# Altium PCB Monotith_MainPart_A_V5.0.PcbDoc
Units mil, origin at the board's own origin, x right, y up, seen from the top; angles counter-clockwise.
Board outline 4035.32 x 1310.05 mil, 2 copper layers (Top Layer, Bottom Layer); 115 components, 68 nets, 355 pads, 314 vias.
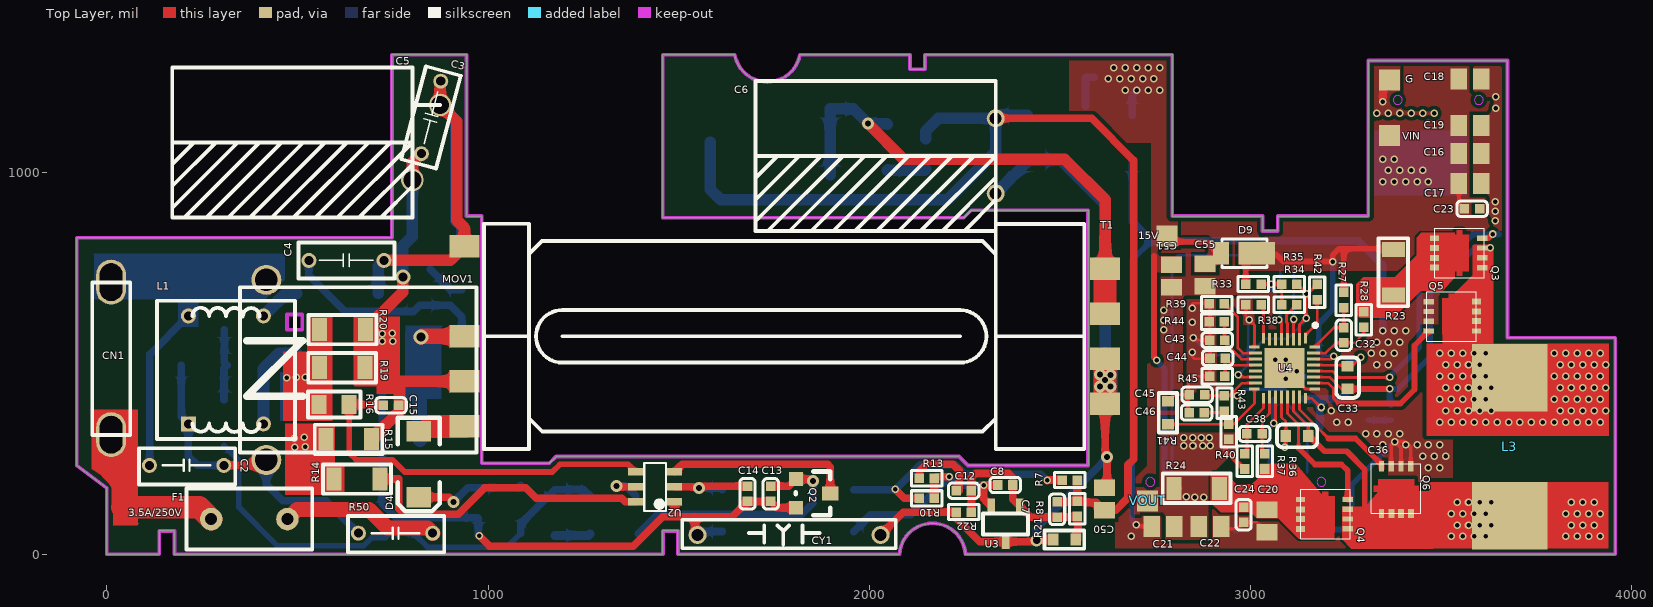
[diagram p0: Top Layer view]
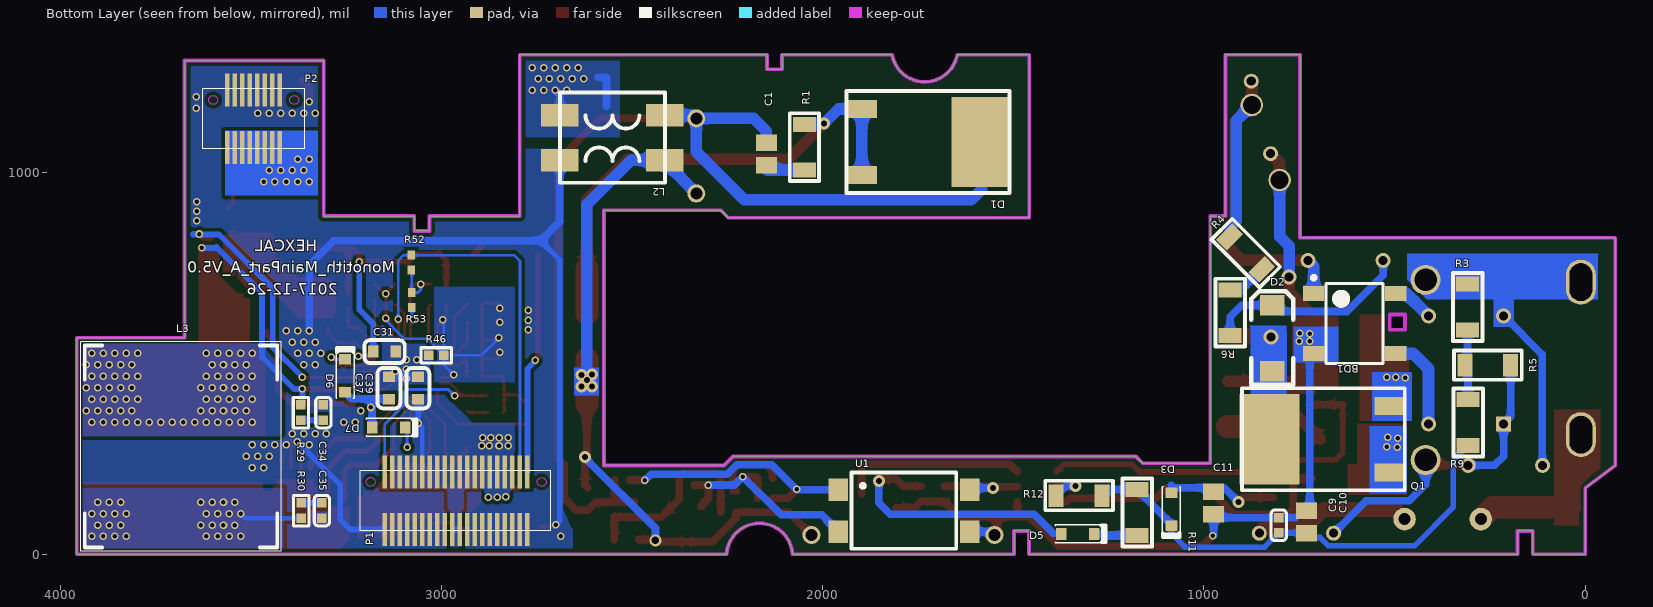
[diagram p1: Bottom Layer view, seen from below]

## Layer stack, top to bottom
Top Solder: solder mask 0.4, Solder Resist, Dk 3.5
Top Layer: signal copper 1.4
Dielectric 1: dielectric 12.6, FR-4, Dk 4.8
Bottom Layer: signal copper 1.4
Bottom Solder: solder mask 0.4, Solder Resist, Dk 3.5

## Board outline
0,0 137.99,0 137.99,60.92 177.36,60.92 177.36,0 1458.85,0 1458.85,60.92 1498.22,60.92 1498.22,0 2079.22,0 cw(c2165.66,-5.55) 2252.09,0.08 2252.09,0 3956.57,0 3956.57,567.46 3673.57,567.46 3673.53,567.51 3673.53,1294.74 3308.56,1294.74 3308.56,886.92 3071.06,886.92 3071.06,847.78 3031.69,847.78 3031.69,886.92 2794.39,886.92 2794.39,1310.05 2145.86,1310.05 2145.86,1271.99 2106.49,1271.99 2106.49,1310.05 1817.88,1310.05 1817.88,1310.04 cw(c1732.6,1325.18) 1647.32,1310.03 1647.32,1310.05 1458.16,1310.05 1458.16,882.54 2247.62,882.54 2267.25,902.17 2573.86,902.17 2573.86,232.88 2258.9,232.88 2258.9,232.93 2235.27,256.56 1178.77,256.56 1178.76,256.56 1160.66,238.45 983.81,238.45 983.81,886.92 943.99,886.92 943.99,1310.05 748.04,1310.05 748.03,829.74 -78.74,829.74 -78.74,232.86 0,173.8
cut-out: 472.57,588.46 512.57,588.46 512.57,628.46 472.57,628.46

## Design rules (kind name [scope] priority, off if disabled: settings)
Clearance Clearance_2 [OnLayer('Top Overlay') vs OnLayer('Keep-Out Layer')] p1: gap=0
Clearance Clearance_1 [OnLayer('Keep-Out Layer') vs InComponent('T1')] p2: gap=0
Clearance [All] p3: gap=6 except(10: Arc-Poly Track-Poly SMDPad-Poly THPad-Poly Via-Poly Fill-Poly Poly-Poly)
ComponentClearance [All] p1 off: gap=10 collisioncheckmode=3 verticalgap=10 showdistances=FALSE
DiffPairsRouting [All] p1: maxlimit=10 minlimit=7 mostfreqgap=7 toplayer_minwidth=7 toplayer_maxwidth=15 toplayer_prefwidth=7 bottomlayer_minwidth=7 bottomlayer_maxwidth=15 bottomlayer_prefwidth=7 maxuncoupledlength=500
HoleToHoleClearance [All] p1 off: gap=10 allowstackedmicrovias=TRUE
MinimumSolderMaskSliver [All] p1 off: minsoldermaskwidth=10
PolygonConnect [All] p1: connectstyle=Direct reliefconductorwidth=10 reliefentries=4 polygonreliefangle="90 Angle" airgapwidth=10
RoutingVias [All] p1: holewidth=15.75 width=31.5 viastyle="Through Hole" minholewidth=11.81 minwidth=7.87 maxholewidth=28 maxwidth=50
SilkToSilkClearance [All] p1 off: silktosilkclearance=10
SilkToSolderMaskClearance [IsPad] p1 off: minsilkscreentomaskgap=10 clearancetoexposedcopper=TRUE
SolderMaskExpansion [All] p1: expansion=4
Width [All] p1: maxlimit=60 minlimit=7 preferedwidth=10
24 further rules are at their usual default settings.

## Classes and differential pairs
component class Monotith-MainPart-SC8701-V5.0: C16 C17 C18 C19 C20 C21 C22 C23 C24 C31 C32 C33 C34 C35 C36 C37 C38 C39 C43 C44 C45 C46 D6 D7 G L3 P1 P2 Q3 Q4 Q5 Q6 R23 R24 R27 R28 R29 R30 R33 R34 R35 R36 R37 R38 R39 R40 R41 R42 R43 R44 R45 R46 R52 R53 U4 VIN VOUT
component class Monotith-MainPart-ACDC-V5.0: 15V BD1 C1 C2 C3 C4 C5 C6 C7 C8 C9 C10 C11 C12 C13 C14 C15 C50 C51 C55 CN1 CY1 D1 D2 D3 D4 D5 D9 F1 L1 L2 MOV1 Q1 Q2 R1 R3 R4 R5 R6 R7 R8 R9 R10 R11 R12 R13 R14 R15 R16 R19 R20 R21 R22 R50 T1 U1 U2 U3
differential pair SW2: +SW2_P -SW2_N
differential pair SW1: +SW1_P -SW1_N
differential pair SNS2: +SNS2_P -SNS2_N
differential pair SNS1: +SNS1_P -SNS1_N

## Components (designator, comment, footprint, x,y, rotation, side; value= is the part's Value field where it differs from the comment)
15V "Testpoint" TP_Pad 2781,835 r0 top
BD1 "ABS210" SOP400P640X170-4N 605,605 r180 bottom
C1 "1nF" C0805 2147.57,1049.46 r90 bottom
C2 "0.33uF" CAP50 337,278 r180 top
C3 "10nF" CAP-5 850.57,1145.46 r255 top
C4 "2.2nF" CAP-5 628.57,770.46 r180 top
C5 "22uF" EC-1016-3 860.63,1079.89 r0 top locked
C6 "680uF/25V" EC-1016 2331.57,1241.46 r180 top locked
C7 "NC" C0402 2492.57,117.46 r0 top
C8 "47pF" C0402 2356.57,181.46 r90 top
C9 "0.1uF" C0402 804,76 r0 bottom
C10 "4.7uF" C0805 731,84 r90 bottom
C11 "22uF" C0805 974.57,134.46 r270 bottom
C12 "0.1uF" C0402 2247.57,166.46 r90 top
C13 "100pF" C0402 1741.57,158.46 r180 top
C14 "1nF" C0402 1680.57,158.46 r0 top
C15 "200pF" C0402 745.57,390.46 r90 top
C16 "22uF" C0805 3576.1,1050.46 r180 top
C17 "22uF" C0805 3576.1,972.46 r180 top
C18 "22uF" C0805 3576.1,1246.46 r180 top
C19 "22uF" C0805 3576.05,1124.46 r180 top
C20 "22uF" C0805 3042.57,87.46 r90 top
C21 "22uF" C0805 2770,73 r0 top
C22 "22uF" C0805 2894,73 r180 top
C23 "0.1uF" C0402 3581,906 r270 top
C24 "0.1uF" C0402 2981.57,103.46 r180 top
C31 "1uF" C0603 3149.05,531.46 r270 bottom
C32 "47pF" C0402 3244.57,574.46 r0 top
C33 "0.1uF" C0603 3254.57,462.99 r180 top
C34 "1nF" C0402 3309.57,371.46 r0 bottom
C35 "1nF" C0402 3313.57,114.46 r180 bottom
C36 "0.1uF" C0603 3122.1,310.46 r270 top
C37 "1uF" C0603 3137.57,435.46 r0 bottom
C38 "47pF" C0402 3010.57,315.46 r270 top
C39 "1uF" C0603 3061.57,435.46 r180 bottom
C43 "2.2nF" C0402 2912.57,561.46 r270 top
C44 "2.2nF" C0402 2913.57,514.46 r270 top
C45 "NC" C0402 2859.57,418.46 r270 top
C46 "22nF" C0402 2858.57,371.46 r270 top
C50 "10nF/50V" C0805 2616.57,144.46 r270 top
C51 "0.01uF" C0805 2792,730 r90 top
C55 "22uF/25V" C0805 2881,732 r90 top
CN1 "CON2" 220V_IN 11.57,513.46 r90 top
CY1 "1nF" CY1 1534.57,10.46 r0 top
D1 "STPS15H100CB-TR" TO-252-DIODE 1937.51,1081.18 r270 bottom
D2 "RS1M" SMD-MLL34 820.57,566.46 r90 bottom
D3 "1N4148" SOD-323F 1085.57,117.46 r270 bottom
D4 "SIM13-F" SMD-MLL34 818,236 r270 top
D5 "22V" SOD-323F 1330.57,53.46 r180 bottom
D6 "BAT46WJ" SOD-323F 3252.57,467.46 r90 bottom
D7 "BAT46WJ" SOD-323F 3138.57,332.46 r180 bottom
D9 "NC" POWERDI123 2902,789 r0 top
F1 "3.5A/250V" 392 209,12 r0 top
G "Testpoint" TP_Pad 3364.57,1243.46 r90 top
L1 "20mH" T7.5*7*8 312.57,483.46 r0 top
L2 "300uH" L-7*6 2551.57,1092.46 r0 bottom
L3 "2.2uH" S0565 3945.57,557.46 r270 bottom locked
MOV1 "10D471" 10D471 418.57,483.46 r270 top
P1 "BtoB_connector_2*20_3H" BB0508-40FTAGF3.0 3148.43,65 r180 bottom
P2 "Header 8X2A" BtoB_connector_2*8_3H 3492.47,1142.07 r180 bottom
Q1 "SW7N65D" TO-252-MOS 473.58,301.46 r90 bottom
Q2 "MMBT3904" "SOT-23 - Transistor" 1852.57,159.46 r270 top
Q3 "AON7752" DFN3.3*3.3_8L 3548,790 r180 top
Q4 "AON7752" DFN3.3*3.3_8L 3196,105 r180 top
Q5 "VS3618AE" DFN3.3*3.3_8L 3527,624 r0 top
Q6 "VS3618AE" DFN3.3*3.3_8L 3382,172 r270 top
R1 "20R" R1206 2047.57,1067.46 r90 bottom
R3 "1.5M" R1206 308.57,648.46 r270 bottom
R4 "100K" R1206 890.57,789.46 r225 bottom
R5 "1.5M" R1206 255.57,495.46 r180 bottom
R6 "100K" R1206 931.57,633.46 r270 bottom
R7 "750R" R0402 2525.57,194.46 r270 top
R8 "137K" R0402 2545.57,119.46 r0 top
R9 "100K" R1206 307.57,345.46 r270 bottom
R10 "1K" R0402 2150.57,146.46 r90 top
R11 "1K" R1206 1175.57,109.46 r270 bottom
R12 "10R" R1206 1327.57,153.46 r180 bottom
R13 "4.7K" R0402 2150.57,199.46 r270 top
R14 "10R" R1206 656.57,197.46 r180 top
R15 "10K" R1206 634.57,301.46 r180 top
R16 "430R" R0805 596.57,392.46 r0 top
R19 "1.3R" R1206 617.57,489.46 r180 top
R20 "1.2R" R1206 618.57,589.46 r180 top
R21 "3.3M" R0603 2511.57,38.46 r0 top
R22 "27K" R0402 2247.57,110.46 r90 top
R23 "0.01R" R1206 3374.57,739.46 r90 top
R24 "0.01R" R1206 2858.57,172.46 r0 top
R27 "1K" R0402 3244.57,666.46 r180 top
R28 "1K" R0402 3296.57,615.46 r180 top
R29 "2.2R" R0402 3368.57,371.46 r180 bottom
R30 "2.2R" R0402 3367.57,114.46 r0 bottom
R33 "100K" R0402 3007.57,708.46 r270 top
R34 "100K" R0402 3101.57,654.46 r90 top
R35 "100K" R0402 3101.57,708.46 r270 top
R36 "1K" R0402 3037.57,243.46 r0 top
R37 "1K" R0402 2984.57,243.46 r0 top
R38 "0R" R0402 3007.57,654.46 r90 top
R39 "68K" R0402 2911.57,656.46 r90 top
R40 "100K" R0402 2943,321 r0 top
R41 "30K" R0603 2783,371 r270 top
R42 "51K" R0402 3174.57,687.46 r180 top
R43 "4.99K" R0402 2931.57,395.46 r180 top
R44 "12.1K" R0402 2911.57,609.46 r90 top
R45 "12.1K" R0402 2912.57,466.46 r90 top
R46 "0R" R0402 3013.57,521.46 r270 bottom
R50 "NTC" CAP50 885,100 r180 top
R52 "0R" 0402 3078.57,764.46 r270 bottom
R53 "0R" 0402 3077.57,666.46 r90 bottom
T1 "T-EDR2810" EDR2810 1776.57,571.46 r0 top
U1 "FOD817CSD" FOD817CSD 1924.57,14.46 r180 bottom
U2 "OB2273" SOT-23-6 1438.57,176.46 r270 top
U3 "TL431" SOT-23-TL431 2357.57,79.46 r180 top
U4 "SC8701" QFN40P400X400X75_HS-33N 3088.96,488.09 r270 top
VIN "Testpoint" TP_Pad 3364.57,1098.46 r90 top
VOUT "Testpoint" TP_Pad 2730,140 r90 top

## Footprints (in the part's own frame and the unit in brackets; to place one, negate y for a bottom-side part, rotate by r counter-clockwise, add the part's x,y. Pads: shape width x height; smd on the part's side, far side on the other; paste and mask are expansions set on the pad)
10D471 [mm]
  round 2 hole 1.5: 1(-6,0) 2(6,0)
  silkscreen extent -5.5,-1.75 5.5,14
220V_IN [mm]
  oval 3x2 hole 1.5 slot 2.5 at 0 deg: 1(-5.081,0) 2(5.081,0)
  silkscreen extent -5.1,-1.28 5.06,1.26
392 [mm]
  round 1.5 hole 0.8: 1(1.651,2.032) 2(6.731,2.032)
  silkscreen extent 0,0 8.38,4.06, body extent 0,0 8.38,4.06, height 7.2
0402 [mm] "Chip Capacitor, Body 1.0x0.5mm, IPC High Density"
  rect 0.6x0.5 smd: 1(-0.5,0) 2(0.5,0)
  body extent -0.55,-0.3 0.55,0.3, height 1.3
BB0508-40FTAGF3.0 [mm]
  rect 0.3x2.2 smd: 1(0,0) 2(0.5,0) 3(1,0) 4(1.5,0) 5(2,0) 6(2.5,0) 7(3,0) 8(3.5,0) 9(4,0) 10(4.5,0) 11(5,0) 12(5.5,0) 13(6,0) 14(6.5,0) 15(7,0) 16(7.5,0) 17(8,0) 18(8.5,0) 19(9,0) 20(9.5,0) 21(9.5,3.83) 22(9,3.83) 23(8.5,3.83) 24(8,3.83) 25(7.5,3.83) 26(7,3.83) 27(6.5,3.83) 28(6,3.83) 29(5.5,3.83) 30(5,3.83) 31(4.5,3.83) 32(4,3.83) 33(3.5,3.83) 34(3,3.83) 35(2.5,3.83) 36(2,3.83) 37(1.5,3.83) 38(1,3.83) 39(0.5,3.83) 40(0,3.83)
  Keep-Out Layer circle w0.013: c10.45,3.165 r0.3
  Keep-Out Layer circle w0.013: c-0.95,3.165 r0.3
  silkscreen extent -1.65,-0.09 11.05,3.91
BtoB_connector_2*8_3H [mm]
  rect 0.3x2.2 smd: 1(-1.75,-1.915) 2(-1.25,-1.915) 3(-0.75,-1.915) 4(-0.25,-1.915) 5(0.25,-1.915) 6(0.75,-1.915) 7(1.25,-1.915) 8(1.75,-1.915) 9(1.75,1.915) 10(1.25,1.915) 11(0.75,1.915) 12(0.25,1.915) 13(-0.25,1.915) 14(-0.75,1.915) 15(-1.25,1.915) 16(-1.75,1.915)
  Keep-Out Layer circle w0.013: c-2.7,1.25 r0.3
  Keep-Out Layer circle w0.013: c2.7,1.25 r0.3
  silkscreen extent -3.4,-2 3.4,2
C0402 [mil]
  rect 25x25 smd: 1(0,20) 2(0,-20)
  silkscreen extent -20,-40 20,40
C0603 [mm]
  rect 0.8x0.7 smd: 1(0,-0.75) 2(0,0.75)
  silkscreen extent -0.76,-1.35 0.76,1.35
C0805 [mm] "Chip Capacitor, Body 2.0x1.3mm, IPC High Density"
  rect 1.1x1.4 smd: 1(-0.75,0) 2(0.75,0)
  body extent -1.1,-0.72 1.1,0.72, height 1.4
CAP50 [mm]
  round 1 hole 0.6: 1(0.762,1.143) 2(5.715,1.143)
  silkscreen extent 0,0 6.4,2.41
CAP-5 [mm]
  round 1 hole 0.6: 1(-2.5,0) 2(2.5,0)
  silkscreen extent -3.2,-1.2 3.2,1.2
CY1 [mm]
  round 1.2 hole 0.8: 1(0.381,1.016) 2(12.573,1.016)
  silkscreen extent -0.64,0.13 13.59,2.03
DFN3.3*3.3_8L [mm]
  rect 0.7x0.35 smd: 1(-1.5,0.975) 2(-1.5,0.325) 3(-1.5,-0.325) 4(-1.5,-0.975)
  rect 0.6x0.35 smd: 5(1.65,-0.975)
  rect 0.6x0.4 smd: 6(1.65,-0.325) 7(1.65,0.325) 8(1.65,0.975)
  Top Layer region: -0.63,-1.225 1.426,-1.225 1.426,1.225 -0.63,1.225
  Top Layer region: -0.215,-1.525 0.215,-1.525 0.215,-0.925 -0.215,-0.925
  Top Layer region: -0.215,0.925 0.215,0.925 0.215,1.525 -0.215,1.525
  silkscreen extent -1.65,-1.65 1.65,1.65, body extent -1.65,-1.65 1.65,1.65, height 0.8
EC-1016 [mm]
  round 1.2 hole 0.8: 1(0,2.5) 2(0,7.5)
  silkscreen extent 0,0 16,10
EC-1016-3 [mm]
  round 1.5 hole 1.2: 1(0.356,2.5) 2(-1.5,-2.5)
  silkscreen extent -17.5,-5 0.36,5
EDR2810 [mm]
  rect 2x1.5 smd: 1(-21.3,6) 3(-21.3,0) 4(-21.3,-3) 5(-21.3,-6) 6(21.387,-4.5) 7(21.387,-1.5) 8(21.387,1.5) 9(21.387,4.5)
  silkscreen extent -20,-7.5 20,7.5
FOD817CSD [mil]
  rect 51.18x59.06 smd: 1(-35,155) 2(-35,45) 3(310,45) 4(310,155)
  silkscreen extent 0,0 275,200, body extent 0,0 275,200, height 157
L-7*6 [mm]
  rect 2.5x1.5 smd: 1(-3.5,1.5) 2(-3.5,-1.5) 3(3.5,-1.5) 4(3.5,1.5)
  silkscreen extent -3.5,-3 3.5,3
POWERDI123 [mm]
  rect 1.05x1.5 smd: A(0.525,0.011)
  rect 2.4x1.5 smd: K(2.9,0.012)
  silkscreen extent 0.6,-0.94 3.6,0.96, body extent 0.6,-0.95 3.6,0.98, height 1
QFN40P400X400X75_HS-33N [mm] "QFN, 32-Leads, Body 4.00x4.00mm, Pitch 0.40mm, Thermal Pad 2.65x2.65mm, IPC Medium Density"
  rect 0.7x0.2 smd: 1(-2,1.4) 8(-2,-1.4) 17(2,-1.4) 24(2,1.4)
  rect 0.85x0.2 smd: 2(-1.925,1) 3(-1.925,0.6) 4(-1.925,0.2) 5(-1.925,-0.2) 6(-1.925,-0.6) 7(-1.925,-1) 18(1.925,-1) 19(1.925,-0.6) 20(1.925,-0.2) 21(1.925,0.2) 22(1.925,0.6) 23(1.925,1)
  rect 0.2x0.7 smd: 9(-1.4,-2) 16(1.4,-2) 25(1.4,2) 32(-1.4,2)
  rect 0.2x0.85 smd: 10(-1,-1.925) 11(-0.6,-1.925) 12(-0.2,-1.925) 13(0.2,-1.925) 14(0.6,-1.925) 15(1,-1.925) 26(1,1.925) 27(0.6,1.925) 28(0.2,1.925) 29(-0.2,1.925) 30(-0.6,1.925) 31(-1,1.925)
  rect 2.65x2.65 smd: 33(0,0)
  silkscreen extent -2.97,1.93 -2.73,2.18, body extent -2.07,-2.07 2.07,2.07, height 0.75
R0402 [mil]
  rect 25x25 smd: 1(0,20) 2(0,-20)
  silkscreen extent -20,-40 20,40
R0603 [mm]
  rect 0.7x0.8 smd: 1(-0.75,0) 2(0.75,0)
  silkscreen extent -1.32,-0.61 1.32,0.61
R0805 [mm]
  rect 1x1.27 smd: 1(-1,0) 2(1,0)
  silkscreen extent -1.74,-0.86 1.74,0.86
R1206 [mil]
  rect 39.37x60 smd: 1(-60,0) 2(60,0)
  silkscreen extent -89,-38 89,39
S0565 [mm]
  rect 4.5x5 smd far side: 1(2.4,6.75) 2(11.6,6.75)
  silkscreen extent 0,0 13.97,13.33, body extent 0,0 13.97,13.33, height 6.5
SMD-MLL34 [mil]
  rect 54x64 smd: A(-86.61,0) K(86.61,0)
  silkscreen extent -122,-55 123,55
SOD-323F [mm]
  rect 0.7x0.8 smd: A(-1.1,0) K(1.1,0)
  silkscreen extent -1.5,-0.63 1.93,0.6
SOP400P640X170-4N [mm] "SOP, 4-Leads, Body 5.05x4.40mm, Pitch 4.00mm, IPC Medium Density"
  rect 1.45x1 smd: 1(-2.725,2) 2(-2.725,-2) 3(2.725,-2) 4(2.725,2)
  silkscreen extent -2.85,-2.65 1.9,3.17, body extent -2.3,-2.65 2.3,2.65, height 1.7
"SOT-23 - Transistor" [mil]
  rect 36x36 smd: B(-37.5,-45) E(37.5,-45)
  rect 36x43.31 smd: C(0.5,45)
  silkscreen extent -58,-45 57,45
SOT-23-6 [mm]
  rect 0.5x1 smd: 1(1,1.3) 2(0,1.3) 3(-1,1.3) 4(-1,-1.3) 5(0,-1.3) 6(1,-1.3)
  silkscreen extent -1.6,-0.73 1.6,0.72
SOT-23-TL431 [mm]
  rect 0.5x1 smd: A(0,1.185) K(0.95,-1.185) R(-0.95,-1.185)
  silkscreen extent -1.5,-0.7 1.5,0.7
T7.5*7*8 [mm]
  rect 1x1 hole 0.6: 1(-2.5,-3.6)
  round 1 hole 0.6: 2(-2.5,3.6) 3(2.5,3.6) 4(2.5,-3.6)
  silkscreen extent -4.6,-4.6 4.6,4.6
TO-252-DIODE [mm]
  rect 1.2x2 smd: A(-2.2,1.024) A(2.2,1.024)
  rect 6x4 smd: K(0,9)
  silkscreen extent -3.4,0 3.4,10.85
TO-252-MOS [mm]
  rect 6x4 smd: D(0,9)
  rect 1.2x2 smd: G(-2.2,1.024) S(2.2,1.024)
  silkscreen extent -3.4,0 3.4,10.85
TP_Pad [mm]
  rect 1.4x1.4 smd paste-1.4: 1(0,0)

## Part data
BD1: library part BD, "Diode Bridge"
C1: library part CAP, "100V"
C2: library part CAP, "275VAC"
C3 C4: library part CAP, "1KV"
C5: library part "CAP EC", "400V"
C6: library part "CAP EC", "25V"
C7 C8 C9 C12 C13 C14 C15 C23 C24 C31 C32 C33 C34 C35 C36 C37 C38 C39 C43 C44 C45 C46: library part CAP, "50V"
C10 C11 C16 C17 C18 C19 C20 C21 C22: library part CAP, "25V"
C50 C51 C55: library part Cap, "Capacitor"
CY1: library part CAP, "250VAC"
D1 D6 D7 D9: library part Diode_Schottky
D2 D3 D4: library part D1, "Diode"
D5: library part Diode_Zener, "Diode_Zener"
F1: library part F-F, "FUSE"
L1 L2: library part T-PS1, "Inductor"
L3: library part L
MOV1: library part MOV, "Varistor"
P2: "Header, 8-Pin, Dual row"
Q1: library part MOS_N, "NMOS"
Q2: library part NPN, "Transistor"
Q3 Q4 Q5 Q6: library part "N-Channel u8-FL_0"
R1 R3 R4 R5 R6 R9 R12 R14 R15 R19 R20 R23 R24: library part RESISTOR, "1/4W"
R7 R8 R10 R11 R13 R16 R21 R22: library part RESISTOR, "1/8W"
R27 R28 R29 R30 R33 R34 R35 R36 R37 R38 R39 R40 R41 R42 R43 R44 R45 R46: library part RESISTOR, "1/10W"
R50: library part "Res Adj1", "Variable Resistor"
R52 R53: library part Res3, "Resistor"
U1: library part PHOTO, "PHOTO"
U3: library part TL341
U4: "CUSTOMER SUPPLIED"

## Via types
v1: diameter 19.68, hole 11.81, Top Layer to Bottom Layer, 300 vias
v2: diameter 31.5, hole 15.75, Top Layer to Bottom Layer, 11 vias
v3: diameter 39.37, hole 23.62, Top Layer to Bottom Layer, 2 vias
v4: diameter 31.5, hole 19.68, Top Layer to Bottom Layer, 1 vias

## Nets (pads, with @x,y where several pads share a name; then routed paths per layer and width w, separated by ;. In a path a pad name is that pad's centre, name@x,y a point inside that pad or via, vN(x,y) a via of type N, cw(c..) or ccw(c..) an arc to the next point about the centre after c; other vN are vias at no path point)
/CE: R42.1 U4.1 | length 105.4
  Top Layer w7: U4.1@3144.08,574.7 3174.57,605.2 R42.1
AC1: BD1.4 L1.3 | length 111
  Bottom Layer w31.5: L1.3 469.55,683.74 BD1.4
AC2: BD1.3 L1.4 | length 247.7
  Bottom Layer w31.5: L1.4 411,486 451.26,526.26 BD1.3
AGND: C43.2 C44.2 C45.2 C46.2 R35.1 R38.1 R39.1 R41.1 R42.2 R44.1 R45.1 R46.1 U4.2 U4.9 U4.14 | length 1438
  Top Layer w7: R41.1 2800.93,418.46 C45.2@2835.57,418.46 ; C46.2@2832.51,377.53 C46.2 ; C46.2@2835.57,374.93 C45.2@2835.57,418.46 ; C45.2 C45.2@2835.57,418.46 ; v1(2846.57,644.96) 2846.57,655.46 2849.57,658.46 2889.57,658.46 R39.1 2893.57,654.46 C44.2 ; v1(2847.57,529.46) 2847.57,517.46 2852.57,512.46 2891.57,512.46 C44.2 ; v1(2849.57,567.46) 2855.57,561.46 C43.2 ; v1(2967.57,470.46) 2973.57,464.47 U4.14@3002.35,464.47 ; R38.1 2987.57,623.46 v1(2996.57,614.46) 3010.22,600.81 U4.9 ; R35.1 3145.57,684.46 v1(3145.57,682.46) 3149.57,682.46 R42.2 ; U4.2 3128.33,602.22 v1(3145.57,619.46) v1@3145.57,678.46 ; C45.2@2835.57,418.46 2835.57,440.46 2836.57,441.46 2836.57,460.46 2842.57,466.46 R45.1 2893.57,467.46 C44.2
  Bottom Layer w7: v1(2849.57,567.46) 2895.57,521.46 R46.1 ; v1(2967.57,470.46) 2993.57,496.46 R46.1 ; v1@2993.57,611.46 R46.1 ; v1(3145.57,619.46) 3145.57,613.46 3097.57,565.46 3037.57,565.46 R46.1
  other v1: 2846.57,608.46
EGND: C6.2 C50.1 CY1.2 L2.1 R21.1 R22.1 T1.6 T1.7 U3.A | length 1993.3
  Top Layer w20: CY1.2 2089.57,110.46 R22.1 2227.57,94.46 2289.23,32.81 U3.A 2434.92,32.81 v4(2438.57,36.46) 2440.57,38.46 R21.1 ; C50.1 2623.57,180.99 v2(2623.57,254.46) 2618.57,259.46 T1.6
  Top Layer w60: T1.6 v2(2618.57,457.46) T1.7
  Bottom Layer w20: v4(2438.57,36.46) 2438.57,67.9 2623.57,252.9 v2(2623.57,254.46)
  Bottom Layer w30: C6.2 2413.78,1028.39 L2.1 2502.63,1033.41 2618.57,917.46 v2(2618.57,457.46)
  other v2: 2604.57,440.46 2632.57,440.46 2632.57,470.46 2604.57,471.46
FB: C14.1 U1.4 U2.2 | length 254.3
  Top Layer w20: U2.2 1550.57,176.46 1552.57,178.46 C14.1
  Bottom Layer w20: v2(1553.57,173.46) 1610.57,173.46 U1.4
GND: C16.1 C17.1 C18.1 C19.1 C20.1 C21.1 C22.1 C23.1 C24.1 C31.2 C34.2 C35.2 C37.1 C39.2 C51.1 C55.1 G.1 L2.4 P1.1 P1.2 P1.3 P1.4 P1.5 P1.6 P1.7 P1.8 P1.9 P1.12 P1.13 P1.14 P1.15 P1.16 P1.17 P1.18 P1.19 P1.20 P2.9 P2.10 P2.11 P2.12 P2.13 P2.14 P2.15 P2.16 Q5.1 Q5.2 Q5.3 Q6.1 Q6.2 Q6.3 R46.2 U4.25 U4.33 | length 2856.1
  Top Layer w7: C22.1@2925.1,66.46 2964.57,66.46 C24.1 3017.05,83.46 C20.1 ; U4.33 3144.08,432.97 U4.25@3175.57,432.97
  Top Layer w10: v1(2700.57,77.46) 2705.03,73 C21.1 ; Q6.3@3369.16,225.46 3369.16,286.05 v1(3378.57,295.46) ; Q6.2@3394.76,225.46 3394.76,279.28 v1(3378.57,295.46) ; Q6.1@3420.35,225.46 3420.35,279.69 3404.57,295.46 v1(3378.57,295.46)
  Top Layer w20: 3346.57,1196.46 3346.57,1225.46 G.1
  Bottom Layer w15: v1(2700.57,77.46) 2689.37,88.67 2689.37,771.37 2740,822 ; P1.1 3239,65 3265.72,91.72 3265.72,182.61 v1(3378.57,295.46)
  Bottom Layer w20: L2.4 2689.37,872.63 2740,822 3283,822 3346.57,758.43 v1(3346.57,586.46) ; C39.2 C37.1
  other v1: 2686.57,46.46 2686.57,46.46 3466.57,226.46 3466.57,226.46 3496.57,226.46 3496.57,226.46 3451.57,256.46 3451.57,256.46 3481.57,256.46 3481.57,256.46 3511.57,256.46 3511.57,256.46 3346.57,286.46 3346.57,286.46 3406.57,286.46 3406.57,286.46 3436.57,286.46 3436.57,286.46 3466.57,286.46 3466.57,286.46 3496.57,286.46 3496.57,286.46 3301.57,316.46 3301.57,316.46 3331.57,316.46 3331.57,316.46 3361.57,316.46 3361.57,316.46 3391.57,316.46 3391.57,316.46 3226.57,346.46 3226.57,346.46 3256.57,346.46 3256.57,346.46 3211.57,376.46 3211.57,376.46 3092.57,460.46 3121.57,479.46 3092.57,484.46 3331.57,496.46 3331.57,496.46 3361.57,496.46 3361.57,496.46 3092.57,509.46 3064.57,510.46 3316.57,526.46 3316.57,526.46 3346.57,526.46 3346.57,526.46 3376.57,526.46 3376.57,526.46 3331.57,556.46 3331.57,556.46 3361.57,556.46 3361.57,556.46 3391.57,556.46 3391.57,556.46 3346.57,586.46 3376.57,586.46 3376.57,586.46 3406.57,586.46 3406.57,586.46 2772,589 2772,614 2772,640 3642,875 3642,899 3642,924 3331.57,1156.46 3331.57,1156.46 3361.57,1156.46 3361.57,1156.46 3391.57,1156.46 3391.57,1156.46 3421.57,1156.46 3421.57,1156.46 3451.57,1156.46 3451.57,1156.46 3481.57,1156.46 3481.57,1156.46 3643,1170 3346.57,1186.46 3346.57,1186.46 3643,1200
IPWM: R53.1 U4.5 | length 92.6
  Top Layer w7: v1(3073.57,615.46) 3081.09,607.95 U4.5
  Bottom Layer w7: R53.1 3077.57,619.46 v1(3073.57,615.46) v1@3078.48,615.46
ITUNE: U4.6
NetBD1_1: BD1.1 C3.1 C4.1 C5.1 R4.1 T1.1 | length 1154.3
  Top Layer w30: C4.1 900.77,770.46 T1.1 937.99,856.15 917.99,876.15 917.99,1134.95 C5.1 874.63,1239.11 C3.1
  Bottom Layer w30: BD1.1 712.28,755.74 C4.1 ; C5.1 915.57,1137.37 915.57,874.46 931.57,858.46 R4.1@931.57,826.46
NetC1_1: C1.1 R1.1 | length 102.2
  Bottom Layer w30: R1.1@2048.57,1008.46 R1.1 2145.57,1007.46 C1.1@2147.57,1009.46
NetC1_2: C1.2 C6.1 C7.1 C50.2 D1.K L2.2 R7.1 R8.1 | length 2888.6
  Top Layer w20: C6.1 2583,1143.04 2693.57,1032.46 2693.57,249.46 2678.57,234.46 2678.57,147.46 2646.05,114.93 C50.2 2595.17,136.33 2545.57,136.33 R8.1 2545.57,166.96 ; C7.1 R8.1@2540.57,137.46 ; R7.1 2545.57,166.96 ; 2546.07,167.46 2545.57,166.96
  Bottom Layer w30: D1.K 1583.18,956.86 1610.57,929.46 2205.57,929.46 2331.57,1055.46 C6.1 ; C1.2@2147.57,1089.46 2147.57,1109.46 2181.15,1143.04 C6.1 ; L2.2 2340.05,1151.52 C6.1
NetC2_1: C2.1 L1.1 MOV1.2 R5.2 R50.2 | length 825.1
  Top Layer w20: C2.1 404.33,233 MOV1.2
  Bottom Layer w20: R5.2 195.57,360.3 L1.1 214.15,257 238.15,233 C2.1 ; MOV1.2 418.57,182.95 461.53,140 575,140 R50.2
NetC2_2: C2.2 CN1.2 L1.2 MOV1.1 R3.1 | length 844.1
  Bottom Layer w20: C2.2 112.57,233.57 112.57,523.62 L1.2
  Bottom Layer w59.05: CN1.2 412.39,713.5 MOV1.1
NetC4_2: C4.2 D2.K R6.2 | length 548.4
  Bottom Layer w20: C4.2 530.15,731.31 625,636.46 803.96,636.46 D2.K 900.96,653.07 931.57,622.46 R6.2
NetC7_2: C7.2 C8.2 C12.2 R8.2 R21.2 R22.2 U3.R | length 509.5
  Top Layer w19.68: R22.2 C12.2 2267.57,200.46 2279,211.88 2365.12,211.88 2376.57,200.43 ; U3.R 2423.63,97.46 C7.2
  Top Layer w20: 2376.57,200.43 C8.2 2376.57,144.52 U3.R ; C7.2 R8.2@2540.57,97.46 ; R8.2 2547.1,97.93 R21.2@2547.1,38.46
NetC8_1: C8.1 R10.2 R13.1 U1.2 U3.K | length 603.3
  Top Layer w19.86: R10.2 R13.1 2174.57,203.46 v1(2209.57,203.46)
  Top Layer w20: U3.K 2299.57,146.71 v1(2299.57,181.46) C8.1
  Bottom Layer w19.86: U1.2 2003.04,102.92 2109.04,102.92 v1(2209.57,203.46)
  Bottom Layer w20: v1(2209.57,203.46) 2231.57,181.46 v1(2299.57,181.46)
NetC9_1: C9.1 C10.1 D3.K R9.2 R11.1 R12.2 | length 1254.9
  Bottom Layer w15: R9.2 346.57,246.46 346.57,123.24 448,21.81 673.75,21.81 695.93,44 731,44 743,56 C9.1 841.5,18.5 1049.61,18.5 1085.57,54.47
  Bottom Layer w20: 1085.57,54.47 1085.57,79.46 R11.1 1251.57,169.46 R12.2
NetC11_1: C11.1 D3.A D4.K | length 291.2
  Top Layer w20: D4.K 897.65,149.39 v2(909.57,137.46)
  Bottom Layer w20: v2(909.57,137.46) 946.57,174.46 974.57,174.46 1077.58,174.46 1078.58,173.46 1085.57,180.45
NetC12_1: C12.1 R13.2 | length 197.5
  Top Layer w20: R13.2 2132.57,201.46 2132.57,218.46 2149.67,235.56 2219.48,235.56 2235.51,219.53 2235.51,166.46 C12.1
NetC13_2: C13.2 D5.A Q2.B | length 670.5
  Top Layer w20: C13.2 1789.07,178.46 Q2.B 1847.07,196.96 v2(1852.57,191.46)
  Bottom Layer w20: 1393.57,53.46 1445.09,104.99 1823.1,104.99 1852.57,134.46 v2(1852.57,191.46)
NetC15_1: C15.1 R16.2 U2.4 | length 1005.7
  Top Layer w15: R16.2 635.94,266.06 654,248 749.03,248 781.52,215.52 1168.67,215.52 1188.71,235.56 1367.67,235.56 U2.4
  Top Layer w20: R16.2 723.57,392.46 C15.1
NetC32_1: C32.1 R27.1 U4.32 | length 150.1
  Top Layer w7: U4.32 3218.95,594.46 C32.1 R27.1
NetC32_2: C32.2 R28.1 U4.31 | length 159.1
  Top Layer w7: U4.31@3175.57,527.46 3196.57,527.46 3223.57,554.46 C32.2 3272.57,554.46 3296.57,578.46 R28.1
NetC33_1: C33.1 D6.K U4.29 | length 171.7
  Top Layer w7: U4.29@3175.57,495.96 3248.71,495.96 3252.87,491.8 3256.14,484.03 v1(3288.57,516.46)
  Bottom Layer w7: D6.K 3282.88,510.77 v1(3288.57,516.46)
NetC34_1: C34.1 R29.2 | length 59
  Bottom Layer w15: C34.1 R29.2
NetC35_1: C35.1 R30.2 | length 54
  Bottom Layer w15: C35.1 R30.2
NetC36_1: C36.1 D7.K U4.20 | length 181.4
  Top Layer w7: U4.20@3081.09,401.48 3081.09,358.95 3092.57,347.46 C36.1 3092.57,283.46 v1(3089.57,280.46)
  Bottom Layer w7: v1(3089.57,280.46) 3089.57,326.77 D7.K
NetC38_1: C38.1 R36.1 U4.18 | length 148.8
  Top Layer w7: R36.1 3030.57,270.46 C38.1 3030.57,350.46 3049.59,369.48 U4.18@3049.59,401.48
NetC38_2: C38.2 R37.1 U4.17 | length 158.4
  Top Layer w7: R37.1 2990.57,269.46 C38.2 2990.57,340.46 3033.84,383.73 U4.17@3033.84,401.48
NetC43_1: C43.1 R44.2 U4.11 | length 142.3
  Top Layer w7: R44.2 2931.57,562.46 C43.1 2932.57,555.46 2976.32,511.71 U4.11@3002.35,511.71
NetC44_1: C44.1 R45.2 U4.12 | length 124.8
  Top Layer w7: R45.2 2933.57,467.46 C44.1 2952.07,495.96 U4.12@3002.35,495.96
NetC46_1: C46.1 R43.1 | length 54.7
  Top Layer w7: C46.1 2927.57,371.46 R43.1
NetCN1_1: CN1.1 F1.1 | length 462.1
  Top Layer w59.05: CN1.1 11.57,220.47 42.53,189.52 42.53,123.51 ; 49.57,114.46 40.53,123.51 42.53,123.51 ; F1.1 242.49,123.51 42.53,123.51
NetD1_A: D1.A R1.2 T1.8 T1.9 | length 1344.1
  Top Layer w30: v2(1996.57,1129.46) 2090.57,1035.46 2512.57,1035.46 2618.57,929.46 T1.9
  Top Layer w60: T1.8 T1.9
  Bottom Layer w30: D1.A@1897.19,994.56 1897.19,1167.79 1958.24,1167.79 v2(1996.57,1129.46) 2045.57,1129.46 R1.2
NetD2_A: D2.A Q1.D T1.3 | length 384.5
  Top Layer w40: v3(824.57,569.46) 826.57,571.46 T1.3
  Bottom Layer w40: Q1.D@821.91,301.46 820.57,302.79 D2.A 820.57,565.46 v3(824.57,569.46)
NetD4_A: D4.A T1.5 | length 88.3
  Top Layer w60: D4.A@849.74,335.24 T1.5
NetD5_K: D5.K R11.2 | length 93.7
  Bottom Layer w23.62: R11.2 1263.58,49.46 1267.58,53.46
NetF1_2: F1.2 R50.1 | length 425.7
  Top Layer w40: F1.2@474,100.69 F1.2 499,117 688,117 736.15,68.85 841.15,68.85 R50.1
NetQ1_G: Q1.G R14.2 R15.2
  other v1: 493.57,280.46 520.57,281.46 491.57,304.46 517.57,306.46
NetQ1_S: Q1.S R16.1 R19.2 R20.2
  other v1: 472.57,462.46 497.57,463.46 520.57,463.46
NetQ2_C: Q2.C U2.3 | length 488.4
  Top Layer w20: U2.3 1509.48,235.56 1890.48,235.56 1897.57,228.46 Q2.C
NetQ5_4: Q5.4 U4.26 | length 475.7
  Top Layer w7: U4.26@3175.57,448.72 3203.31,448.72 3217.57,434.46 3217.57,409.46 3231.57,395.46 ; 3234.07,397.96 3234.57,397.46
  Top Layer w15: 3231.57,395.46 3393.46,395.46 3430,432 3430,547.38 Q5.4@3467.69,585.07
NetQ6_4: Q6.4 U4.23 | length 306.8
  Top Layer w7: U4.23@3128.33,401.48 3128.33,379.7 3204.57,303.46
  Top Layer w15: 3204.57,303.46 3275.57,303.46 3343.57,235.46 Q6.4@3343.57,225.46
NetR3_2: R3.2 R5.1 R9.1 | length 189.2
  Bottom Layer w20: R9.1 307.57,487.46 R5.1 308.57,502.46 R3.2
NetR4_2: R4.2 R6.1 | length 105.6
  Bottom Layer w20: R4.2 901.72,693.46 R6.1
NetR7_2: R7.2 R10.1 U1.1 | length 662.8
  Top Layer w20: v1(2068,170) 2091.54,146.46 R10.1 ; v1(2466.57,193.46) 2467.57,194.46 R7.2
  Bottom Layer w20: U1.1 2068.46,169.46 2133.69,234.69 2187.81,234.69 2225.12,234.69 2249.95,209.86 2450.17,209.86 v1(2466.57,193.46)
NetR12_1: R12.1 U2.5 | length 111
  Top Layer w20: v2(1337.57,178.46) 1339.57,176.46 U2.5
  Bottom Layer w20: v2(1337.57,178.46) 1362.57,178.46 R12.1
NetR14_1: R14.1 U2.6 | length 798.7
  Top Layer w20: R14.1 766.34,197.46 766.34,119.42 780.91,104.85 921.86,104.85 990.86,173.85 1099.19,173.85 1126.32,146.71 1350.72,146.71 1360.35,137.09 U2.6
NetR34_2: R34.2 U4.4 | length 103
  Top Layer w7: U4.4 3096.83,605.85 3094.23,608.45 3094.23,627.07 R34.2
NetR38_2: R38.2 U4.8 | length 90.2
  Top Layer w7: R38.2 3033.84,648.19 U4.8
NetR39_2: R39.2 U4.10 | length 171.7
  Top Layer w7: R39.2 2966.57,621.46 2966.57,540.46 2979.57,527.46 U4.10@3002.35,527.46
NetR40_1: R40.1 R41.2 U4.16 | length 287.7
  Top Layer w7: R41.2 2783.47,341 R40.1 2956.11,341 3010.22,395.11 U4.16
PGND: BD1.2 C3.2 C5.2 C9.2 C10.2 C11.2 C13.1 C14.2 C15.2 CY1.1 Q2.E R15.1 R19.1 R20.1 T1.4 U1.3 U2.1 | length 2712.4
  Top Layer w20: v1(976.57,48.46) 1004.03,21 1381.11,21 1458.57,98.46 1490.57,98.46 ; U2.1 1489.76,99.28 1490.57,98.46 ; CY1.1 1542.76,57.28 1542.76,98.46 ; Q2.E 1758.07,121.96 C13.1 C14.2 1640.57,98.46 1542.76,98.46 ; 1490.57,98.46 1542.76,98.46
  Top Layer w30: R19.1 713.68,453.35 T1.4 ; R20.1 776.57,687.46 v3(776.57,726.46) ; R15.1 765.57,372.46 C15.2 ; C5.2 801.57,1026.86 C3.2
  Bottom Layer w20: v1(722.57,558.46) 722.57,132.43 759,96 C9.2 973.04,96 974.57,94.46 974.57,50.46 v1(976.57,48.46) ; CY1.1 1558.57,59.46 U1.3
  Bottom Layer w30: v3(776.57,726.46) 776.57,808.15 801.57,833.15 C5.2
  other v1: 749.57,558.46 722.57,578.46 748.57,579.46
PWM: P1.22 R52.1 U4.3 | length 1092.7
  Top Layer w7: U4.3 3112.58,615.47 v1(3113.57,616.46)
  Bottom Layer w7: P1.22 2794.09,769.09 2809.15,784.15 R52.1 3098.89,784.15 3113.57,769.46 v1(3113.57,616.46) v1@3115.22,616.46
SNS1_N: Q3.5 Q3.6 Q3.7 Q3.8 R23.1 R28.2
SNS1_P: C16.2 C17.2 C18.2 C19.2 C23.2 C31.1 D9.K P2.1 P2.2 P2.3 P2.4 P2.5 P2.6 P2.7 P2.8 R23.2 R27.2 R33.2 U4.30 VIN.1 | length 1041.3
  Top Layer w7: U4.30@3175.57,511.71 3210.83,511.71 v1(3218.57,519.46)
  Top Layer w10: C17.2 3546.57,920.43 C23.2
  Top Layer w15: R33.2 2987.57,771.85 3006.15,790.42 3010.12,786.46 3066.57,786.46 3085.57,767.46 v1(3215.57,767.46) 3215.57,784.46 3232.57,801.46 R23.2@3374.57,801.46 ; R27.2 3244.57,801.46
  Bottom Layer w7: C31.1 3190.57,519.46 v1(3218.57,519.46)
  Bottom Layer w10: P2.2 P2.1
  Bottom Layer w15: C31.1 3178.57,604.46 3215.57,641.46 v1(3215.57,767.46)
  other v1: 3346.57,976.46 3376.57,976.46 3406.57,976.46 3436.57,976.46 3466.57,976.46 3361.57,1006.46 3391.57,1006.46 3421.57,1006.46 3451.57,1006.46 3346.57,1036.46 3376.57,1036.46
SNS2_N: C21.2 C22.2 C39.1 P1.10 P1.11 P1.23 P1.24 P1.25 P1.26 P1.27 P1.28 P1.29 P1.30 P1.31 P1.32 P1.33 P1.34 P1.35 P1.36 P1.37 P1.38 P1.39 R24.1 R37.2 R40.2 U4.19 VOUT.1 | length 368.4
  Top Layer w7: v1(3060.57,343.46) 3063.1,343.46 3065.34,345.7 U4.19@3065.34,401.48
  Top Layer w12: 2933.57,278.46 2933.57,272.49 2982.6,223.46 R37.2
  Top Layer w15: R24.1 R24.1@2813.57,172.46
  Bottom Layer w12: P1.11 P1.10 ; P1.35 3050,332.89 v1(3060.57,343.46)
  Bottom Layer w15: v1(3060.57,343.46) 3060.57,404.93 C39.1
  other v1: 2854,150 2877,150 2831,151 2825,284 2849,284 2874,284 2894,284 2825,305 2848,305 2871,305 2892,306
SNS2_P: C20.2 C24.2 Q4.5 Q4.6 Q4.7 Q4.8 R24.2 R36.2
SW1_N: Q3.4 U4.28 | length 780.9
  Top Layer w7: U4.28@3175.57,480.22 3214.82,480.22 3231.57,463.46 v1(3364.57,463.46)
  Top Layer w15: Q3.4@3605.46,828.85 3623.62,828.85 v1(3634.57,839.8)
  Bottom Layer w15: v1(3364.57,463.46) 3364.57,464.46 3442.57,542.46 3442.57,697.46 3583.57,838.46 3651.57,838.46 3650.23,839.8 v1(3634.57,839.8)
SW1_P: C33.2 L3.1 Q3.1 Q3.2 Q3.3 Q5.5 Q5.6 Q5.7 Q5.8 R29.1 U4.27 | length 763.8
  Top Layer w7: U4.27@3175.57,464.47 3207.57,464.47 3238.57,433.46 C33.2
  Top Layer w15: C33.2@3255.57,432.46 C33.2 v1(3364.57,433.46)
  Bottom Layer w15: R29.1 3364.57,395.46 v1(3364.57,433.46) 3386.57,433.46 3470.57,517.46 3470.57,685.46 3590.57,805.46 3592.78,803.26 v1(3628,803.26)
  other v1: 3496.57,346.46 3526.57,346.46 3556.57,346.46 3556.57,346.46 3586.57,346.46 3586.57,346.46 3616.57,346.46 3616.57,346.46 3646.57,346.46 3646.57,346.46 3676.57,346.46 3676.57,346.46 3706.57,346.46 3706.57,346.46 3736.57,346.46 3736.57,346.46 3766.57,346.46 3766.57,346.46 3796.57,346.46 3796.57,346.46 3826.57,346.46 3826.57,346.46 3856.57,346.46 3856.57,346.46 3886.57,346.46 3886.57,346.46 3916.57,346.46 3916.57,346.46 3511.57,376.46 3541.57,376.46 3541.57,376.46 3571.57,376.46 3601.57,376.46 3631.57,376.46 3811.57,376.46 3811.57,376.46 3841.57,376.46 3841.57,376.46 3871.57,376.46 3871.57,376.46 3901.57,376.46 3901.57,376.46 3931.57,376.46 3931.57,376.46 3496.57,406.46 3526.57,406.46 3556.57,406.46 3556.57,406.46 3586.57,406.46 3616.57,406.46 3796.57,406.46 3796.57,406.46 3826.57,406.46 3826.57,406.46 3856.57,406.46 3856.57,406.46 3886.57,406.46 3886.57,406.46 3916.57,406.46 3916.57,406.46 3511.57,436.46 3541.57,436.46 3541.57,436.46 3571.57,436.46 3601.57,436.46 3631.57,436.46 3811.57,436.46 3811.57,436.46 3841.57,436.46 3841.57,436.46 3871.57,436.46 3871.57,436.46 3901.57,436.46 3901.57,436.46 3931.57,436.46 3931.57,436.46 3496.57,466.46 3526.57,466.46 3556.57,466.46 3556.57,466.46 3586.57,466.46 3616.57,466.46 3796.57,466.46 3826.57,466.46 3856.57,466.46 3886.57,466.46 3916.57,466.46 3511.57,496.46 3541.57,496.46 3541.57,496.46 3571.57,496.46 3601.57,496.46 3811.57,496.46 3841.57,496.46 3871.57,496.46 3901.57,496.46 3931.57,496.46 3496.57,526.46 3526.57,526.46 3556.57,526.46 3556.57,526.46 3586.57,526.46 3616.57,526.46 3796.57,526.46 3826.57,526.46 3856.57,526.46 3886.57,526.46 3916.57,526.46
SW2_N: Q4.4 U4.21 | length 403.2
  Top Layer w7: U4.21@3096.83,401.48 3096.83,369.2 3125.57,340.46 3125.57,278.46
  Top Layer w15: 3125.57,278.46 3168.57,235.46 3238.57,235.46 3254.76,219.27 ; Q4.4@3254.57,143.39 3254.57,219.08 3254.76,219.27 ; 3254.76,180.64 3254.76,219.27
SW2_P: C36.2 L3.2 Q4.1 Q4.2 Q4.3 Q6.5 Q6.6 Q6.7 Q6.8 R30.1 U4.22 | length 578.4
  Top Layer w7: U4.22@3112.58,401.48 3112.58,374.45 3151.63,335.41 3151.63,312.52 C36.2
  Top Layer w15: C36.2@3151.63,312.52 3194.13,270.02 3252.02,270.02 3299.63,222.4 3299.63,100.52
  Bottom Layer w12: R30.1 3514.57,94.46 v1(3526.57,106.46)
  other v1: 3526.57,46.46 3556.57,46.46 3586.57,46.46 3616.57,46.46 3826.57,46.46 3856.57,46.46 3886.57,46.46 3916.57,46.46 3541.57,76.46 3571.57,76.46 3601.57,76.46 3631.57,76.46 3841.57,76.46 3871.57,76.46 3901.57,76.46 3556.57,106.46 3586.57,106.46 3616.57,106.46 3826.57,106.46 3856.57,106.46 3886.57,106.46 3916.57,106.46 3541.57,136.46 3571.57,136.46 3601.57,136.46 3631.57,136.46 3841.57,136.46 3871.57,136.46 3901.57,136.46
UCVLO: U4.7
V_AC_15V: 15V.1 C51.2 C55.2 D9.A L2.3 P1.21 | length 912
  Top Layer w15: 2747,782 2747,516 v1(2754,509) ; 15V.1@2761.57,819.46 2883.57,819.46 D9.A@2916.57,786.46
  Bottom Layer w15: v1@2754,507 2774.41,486.59 P1.21
  Bottom Layer w20: 2567.1,1175.46 2567.1,1249.46 2568.1,1250.46 2590.42,1250.46 ; L2.3 2689.37,1204.26 v1(2701.57,1216.46)
  other v1: 2671.57,1216.46 2731.57,1216.46 2761.57,1216.46 2626.57,1246.46 2656.57,1246.46 2686.57,1246.46 2716.57,1246.46 2746.57,1246.46 2641.57,1276.46 2671.57,1276.46 2701.57,1276.46 2731.57,1276.46 2761.57,1276.46
V_COMP: C45.1 P1.40 R43.2 U4.15 | length 531.1
  Top Layer w7: C45.1 2882.57,415.46 R43.2 2944.57,415.46 ; v1(2965.57,415.46) 2944.57,415.46 ; U4.15@3002.35,448.72 2977.83,448.72 2944.57,415.46
  Bottom Layer w7: v1(2965.57,415.46) 2982.11,432 3091,432 3098,425 3098,392 3148.43,341.57 P1.40
VCC: C37.2 D6.A D7.A U4.24 | length 249.1
  Top Layer w7: U4.24 3160.3,409.35 v1(3184.88,384.77)
  Bottom Layer w7: C37.2 C37.2@3139.1,407.46
  Bottom Layer w20: C37.2@3139.1,407.46 3139.41,407.77 3181.88,407.77 ; D7.A 3181.88,407.77 ; D6.A 3235.88,407.46 3235.57,407.77 3181.88,407.77
VHI: R33.1 R34.1 R35.2 R52.2 R53.2 | length 210
  Top Layer w7: R33.1 v1(3054.57,708.46) R35.2 R34.1 R34.1@3081.09,653.97
  Bottom Layer w7: v1@3055.26,708.46 v1(3054.57,708.46) 3054.57,692.46 3060.89,686.15 R53.2 3077.57,743.78 R52.2
pads on no net: U4.13

## Polygon pours and split planes (outlines as drawn)
AGND on Top Layer "Bottom Layer-No Net" (solid, remove dead copper, pour order 16): 2840.57,424.46 2953.57,424.46 2953.57,601.46 3010.57,601.46 3009.57,669 3010.57,670 2917,669 2832.57,669 2832.57,441.02 2832.57,424.46
SNS2_N on Top Layer "Bottom Layer-No Net" (solid, remove dead copper, pour order 22): 2776,38 2889,38 2889,110 2888,111 2889,112 2889,218 2906,218 2958,270 2958,319 2864,319 2762,319 2762,202 2762,192 2762,176 2700,176 2696,172 2695,171 2695,105 2776,105
V_AC_15V on Top Layer "Bottom Layer-No Net" (solid, remove dead copper, pour order 24): 2556,1299 2557,1300 2794.39,1300 2794.39,933 2938,933 2938,753 2925,740 2919,740 2739,740 2739,1079 2534,1079 2519,1094 2524,1099 2524,1300 2554,1300
SNS1_P on Top Layer "Bottom Layer-No Net" (solid, remove dead copper, pour order 26): 2961,743 3336,743 3434,743 3569,878 3574,897 3574,1279 3508,1279 3508,1141 3501,1134 2961,1134
SNS1_P on Top Layer "Bottom Layer-No Net" (solid, remove dead copper, pour order 20): 3312,751 3314,753 3314,1284 3667,1284 3668,1283 3661,1276 3661,749 3316,749 3314,751
GND on Top Layer "Bottom Layer-No Net" (solid, remove dead copper, pour order 23): 2729,881 3318.48,881 3320.98,878.5 3324,881.52 3324,1282 3663,1282 3665,1280 3659,1274 3659,562 3951.11,562 3956.57,567.46 3956.57,0 2641,0 2645,4 2645,105 2645,148 2729,232 2729,252 2729,883
AGND on Bottom Layer "Bottom Layer-No Net" (solid, remove dead copper, pour order 17): 2801.57,701.46 3018.57,701.46 3018.57,630.46 3018.57,446.46 3014.57,450.46 2801.57,450.46 2801.57,574.46
SW2_P on Bottom Layer "POWER-No Net" (solid, remove dead copper, pour order 15): 3414.57,163.46 3414.57,143.46 3414.57,91.46 3414.57,4.46 3569.57,-50.54 3571.57,-52.54 3955.57,-52.54 3983.57,-52.54 4052.57,16.46 4065.57,29.46 4065.57,173.46 3514.57,173.46 3414.57,173.46
SW1_P on Bottom Layer "POWER-No Net" (solid, remove dead copper, pour order 14): 3538.57,551.46 3418.57,551.46 3418.57,526.46 3418.57,431.46 3418.57,318.46 3418.57,313.54 3422.65,313.54 3418.57,309.46 3553.99,309.46 3734.57,309.46 3946.57,309.46 3944.57,318.46 3944.57,339.46 3940.56,453.46 3940.56,551.46 3842.56,551.46 3749.57,551.46
V_AC_15V on Bottom Layer "Bottom Layer-No Net" (solid, remove dead copper, pour order 18): 2532,1304 2783,1304 2783,1091 2785,1089 2780,1094 2532,1094 2532,1305
SNS2_N on Bottom Layer "Bottom Layer-No Net" (solid, remove dead copper, pour order 19): 2942,18 2979,18 2980,19 2984,19 2984,23 2984,188 2947,188 2946,187 2942,183
SNS2_N on Bottom Layer "Bottom Layer-No Net" (solid, remove dead copper, pour order 25): 3102,128 3137,128 3137,172 3137,372 3137,386 3091,432 3089,430 3023,430 3004,430 2934,360 2919,345 2806,345 2806,128 2955,128
GND on Bottom Layer "Bottom Layer-No Net" (solid, remove dead copper, pour order 21): 3950,11 3950,558 3947,561 3940,568 3658,568 3658,1283 3654,1287 3650,1283 3318,1283 3318,1061.09 2681,1063.12 2681,116 2659,70 2655,66 2655,2

## Keep-outs
Keep-Out Layer:
  lines w10: 1647.32,1310.03 ccw(c1732.6,1325.18) 1817.88,1310.04 2106.49,1310.05 ; 1647.32,1310.05 1458.16,1310.05 ; 2252.09,0 3956.57,0 3956.57,476.46 3956.57,567.46 3673.57,567.46 3673.53,567.51 3673.53,583.51 ; 2252.09,0.08 ccw(c2165.66,-5.55) 2079.22,0 1498.22,0 1498.22,60.92 1458.85,60.92 1458.85,0 ; 3673.57,583.46 3673.53,583.51 ; -78.74,232.86 0,173.8 0,0 ; -78.74,232.86 -78.74,829.74 ; -78.74,232.86 -78.74,232.86 ; -78.74,829.74 -78.74,829.74 ; -78.74,829.74 748.03,829.74 ; 0,0 0,0 ; 0,0 137.99,0 ; 137.99,0 137.99,0 ; 137.99,0 137.99,60.92 177.36,60.92 177.36,0 1458.85,0 ; 748.03,829.74 748.04,1310.05 ; 748.03,829.74 748.03,829.74 ; 748.04,1310.05 748.04,1310.05 ; 748.04,1310.05 943.99,1310.05 ; 943.99,1310.05 943.99,1310.05 ; 943.99,1310.05 943.99,886.92 983.81,886.92 ; 983.81,886.92 983.81,238.45 1160.66,238.45 ; 983.81,886.92 983.81,886.92 ; 1160.66,238.45 1160.66,238.45 ; 1160.66,238.45 1178.76,256.56 ; 1178.77,256.56 2235.27,256.56 ; 1178.76,256.56 1178.77,256.56 ; 1458.16,882.54 1458.16,882.54 ; 1458.16,882.54 2247.62,882.54 2267.25,902.17 2573.86,902.17 ; 1458.16,882.54 1458.16,1310.05 ; 1458.16,1310.05 1458.16,1310.05 ; 1458.85,0 1458.85,0 ; 2106.49,1310.05 2106.49,1310.05 ; 2106.49,1310.05 2106.49,1271.99 2145.86,1271.99 2145.86,1310.05 ; 2145.86,1310.05 2145.86,1310.05 ; 2145.86,1310.05 2794.39,1310.05 2794.39,886.92 3031.69,886.92 ; 2235.27,256.56 2235.27,256.56 ; 2235.27,256.56 2258.9,232.93 2258.9,232.88 2573.86,232.88 ; 2573.86,232.88 2573.86,902.17 ; 2573.86,232.88 2573.86,232.88 ; 2573.86,902.17 2573.86,902.17 ; 3031.69,886.92 3031.69,886.92 ; 3031.69,886.92 3031.69,847.78 3071.06,847.78 3071.06,886.92 ; 3071.06,886.92 3071.06,886.92 ; 3071.06,886.92 3308.56,886.92 3308.56,1294.74 ; 3308.56,1294.74 3673.53,1294.74 3673.53,583.51 ; 3308.56,1294.74 3308.56,1294.74 ; 472.57,588.46 512.57,588.46 512.57,628.46 472.57,628.46 472.57,588.46

## Other copper
Top Layer:
  rectangle net SW2_P: 3467.57,14.46 3938.57,190
  rectangle net SW1_P: 3461,310 3940.57,553
  pour cut-out: 3940.57,314.46 3940.57,164.46 3530.57,164.46 3530.57,314.46
  region net SW2_P: 3335.57,164.46 3474.57,164.46 3493.57,145.46 3493.57,29.46 3478.57,14.46 3264.57,14.46 3240,39.03 3240,124.46 3302.69,124.46
  region net SW1_P: 3585,812 3583,810 3583,731.11 3504.43,652.54 3504.43,547.58 3544,508 3616,508 3636,528 3636,803 3627,812
  region net SNS1_N: 3535.57,834 3535.57,842.46 3447.57,842.46 3435.57,830.46 3435.57,783.46 3378.57,726.46 3295.46,726.46 3276.57,707.57 3276.57,630.46 3286.57,620.46 3375.57,620.46 3446.57,691.46 3504.46,691.46 3535.57,726.46 3535.57,780.46
  region net NetQ1_S: 526.57,627.46 527.57,628.46 591.57,628.46 591.57,350.46 590.57,349.46 462.57,349.46 462.57,441.46 462.57,487 462.57,530.46 526.57,530.46 527.57,626.46 527.57,627.46
  region net NetQ1_G: 468.57,156.46 621.57,156.46 622.57,157.46 622.57,236.46 598.57,236.46 597.57,237.46 598.57,238.46 597.57,342.46 542.57,342.46 540.57,342.46 468.57,342.46 468.57,250 468.57,244.46
  region net PGND: 647.57,622.46 713.57,622.46 768,622.46 768,531 768,440.46 650.57,440.46 647.57,443.46
  region net PGND: 752.57,369.46 752.57,419.46 750.57,421.46 707.57,421.46 707.57,435.46 707.57,453 746,453 783.57,453 783.57,369.46 781.57,367.46 779.57,369.46
  region net NetCN1_1: 16.57,75.46 80.57,75.46 84.57,79.46 81.57,82.46 81.57,378.46 -42.43,378.46 -39.43,375.46 -39.43,223.46 -38.43,223.46 -4.43,200.46 17.57,167.46 17.57,74.46
  region net SNS2_P: 3015.57,94.46 3072.57,94.46 3126.03,41 3220,41 3220,117.48 3119,237.46 3025.57,237.46 3018.57,230.46 3018.57,198.46 3003.57,183.46 2962.57,183.46 2930.57,215.46 2904.57,215.46 2895.57,206.46 2895.57,135.46 2921.57,109.46 3000.57,109.46
Bottom Layer:
  rectangle net EGND: 2586.57,416.46 2652.57,489.46
  rectangle net SNS1_P: 3323.57,940.46 3567,1111.46
  region net NetQ1_S: 558.57,350.46 460.57,350.46 455.57,350.46 455.57,355.46 455.57,359.46 455.57,477.46 558.57,477.46 558.57,467 558.57,410
  region net NetQ1_G: 472.57,159.46 565.57,159.46 565.57,160.46 565.57,163.46 565.57,335.46 469.57,335.46 468.57,330.46 469.57,329.46 468.57,328.46 468.57,159.46 473.57,159.46 474.57,160.46
  region net PGND: 648.57,597.46 649.57,596.46 764.57,596.46 764.57,507.46 760.57,503.46 647.57,503.46 647.57,595.46 648.57,596.46
  region net NetC2_2: -33.43,787.46 466.57,787.46 466.57,719.46 415.57,668.46 -32.43,668.46 -32.43,784.46 -33.43,785.46
  region net NetC2_2: 192.57,596.46 240.57,596.46 240.57,703.46 239.57,704.46 187.57,704.46 187.57,600.46 192.57,595.46
  region net NetD2_A: 782.57,409.46 781.57,408.46 782.57,407.46 877.57,407.46 877.57,595.46 880.57,598.46 879.57,599.46 784.57,599.46 784.57,586.46 782.57,584.46

## Silkscreen, mask and mechanical layers (free items; w line width, h text height)
Top Overlay:
  text "3.5A/250V" at 57,100 h20
Bottom Overlay:
  text "HEXCAL" at 3326,794 h30
  text "Monotith_MainPart_A_V5.0" at 3121,738 h30
  text "2017-12-26" at 3272,680 h30